# Altium PCB ESP32 USBC V1 1.PcbDoc
Units mil, origin at the board's own origin, x right, y up, seen from the top; angles counter-clockwise.
Board outline 2525 x 1000 mil, 4 copper layers (L1, L2, L3, L4), stack 54.496 mil thick; 67 components, 74 nets, 309 pads, 148 vias.
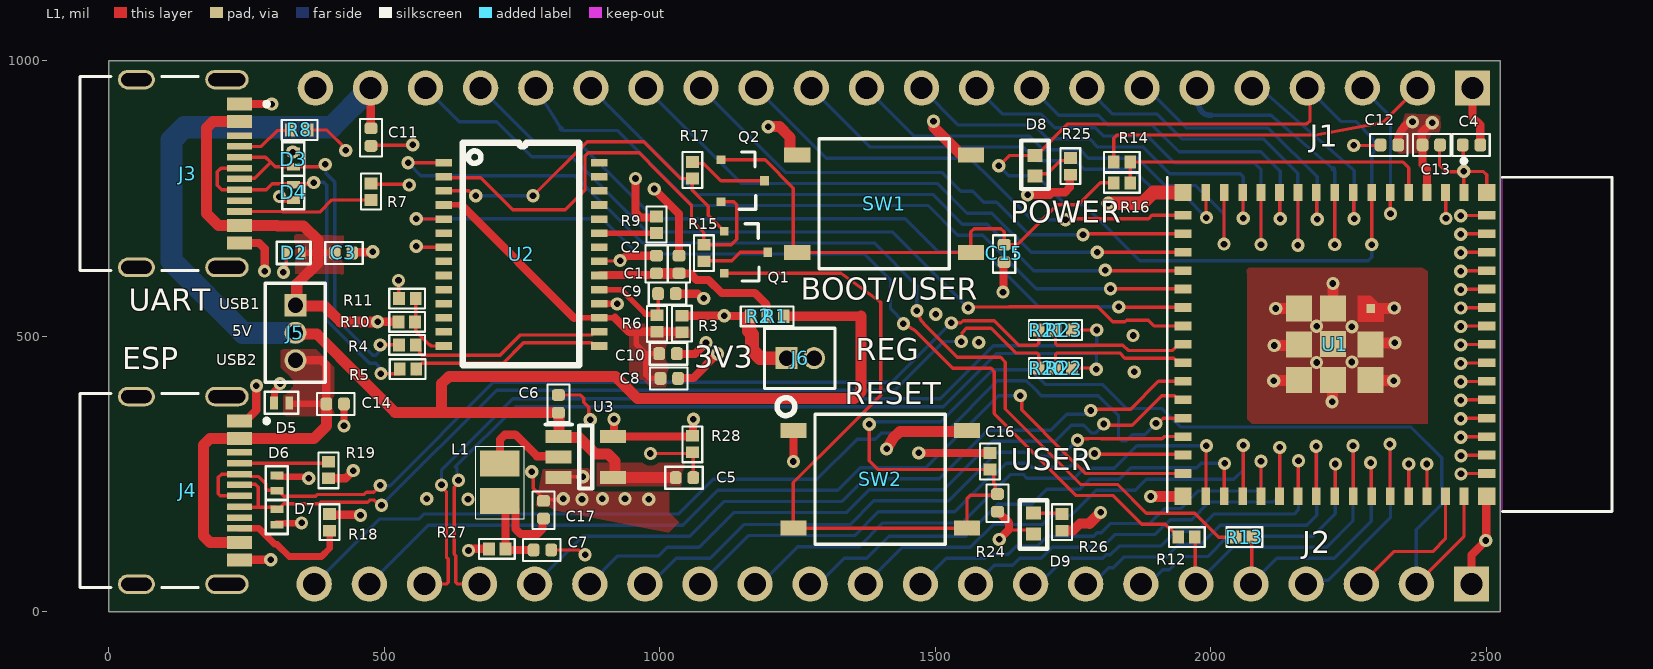
[diagram p0: L1 view]
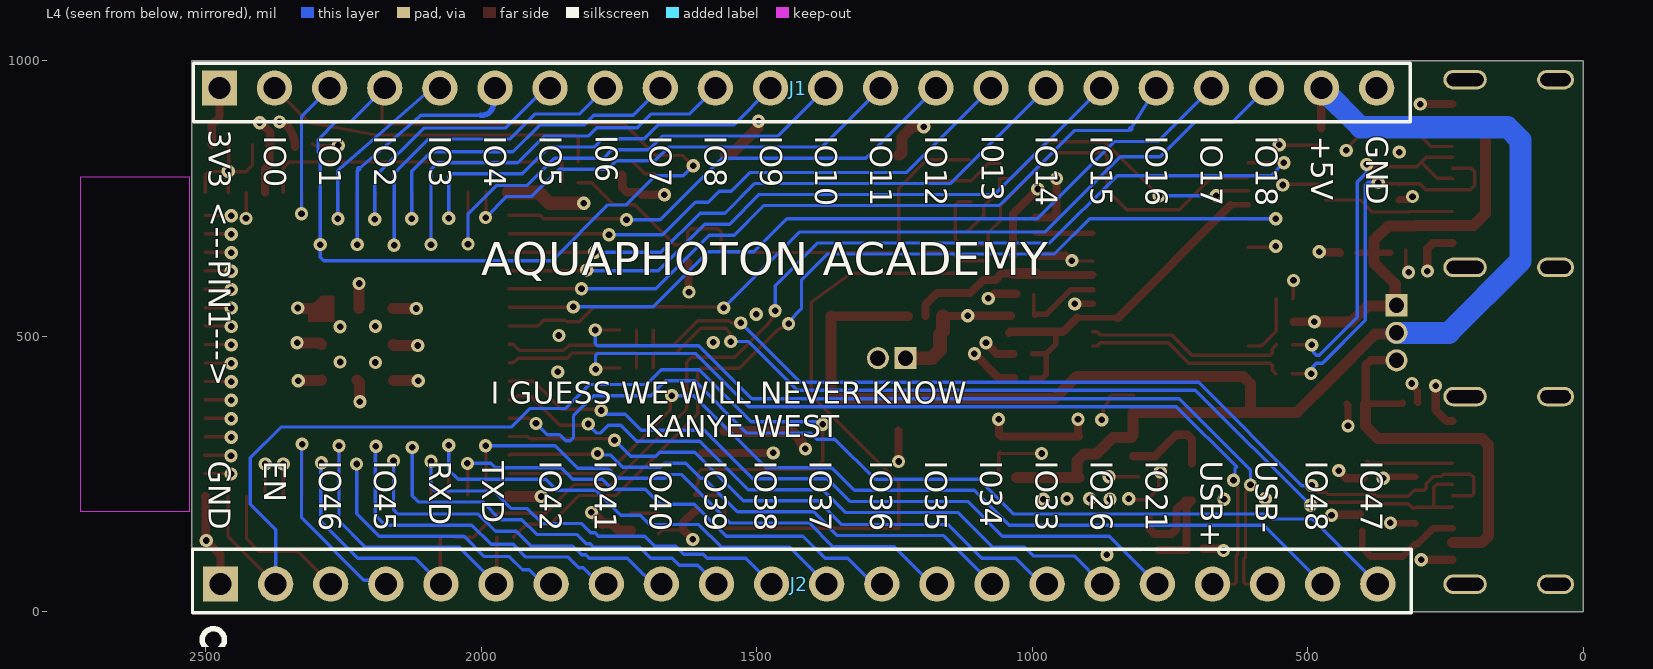
[diagram p1: L4 view, seen from below]
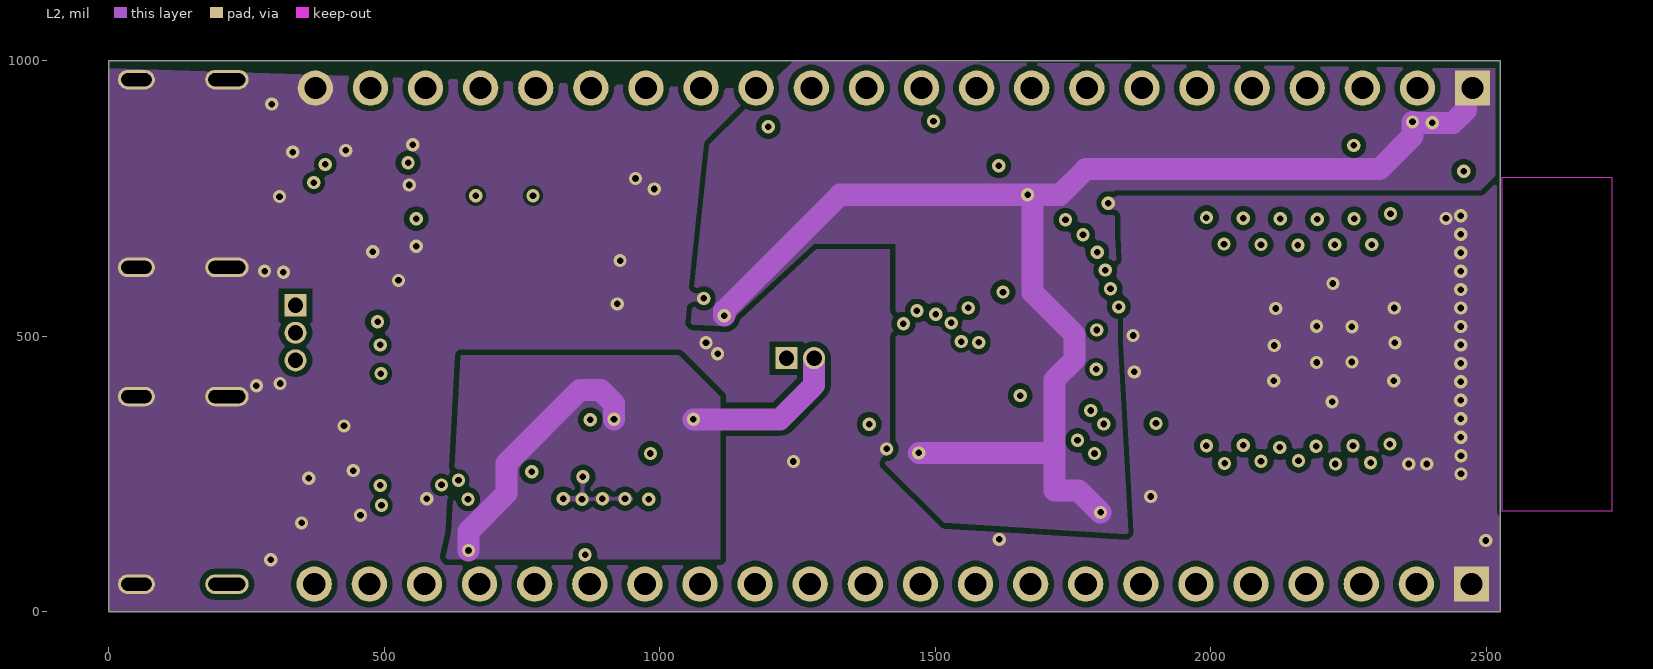
[diagram p2: L2]
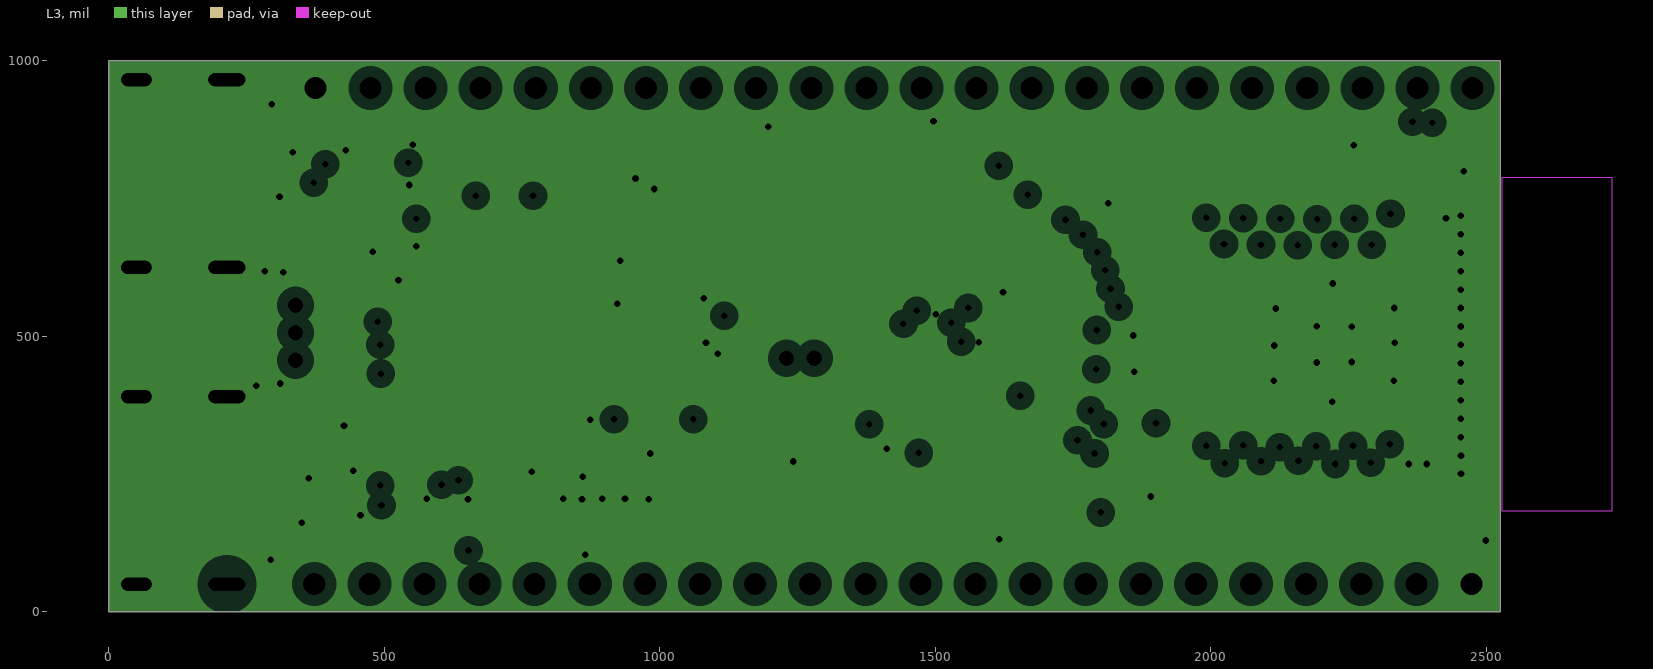
[diagram p3: L3, clearances drawn from the general rule]

## Layer stack, top to bottom
Top Solder: solder mask 0.4, Solder Resist, Dk 3.5
L1: signal copper 1.378
Dielectric 2: prepreg 0.3701, PP-006, Dk 4.1
L2: signal copper 0.5984
Dielectric 1: dielectric 49.8031, FR-4, Dk 4.8
L3: plane copper 1.378, net GND
Dielectric 3: prepreg 0.3701, PP-006, Dk 4.1
L4: signal copper 0.5984
Bottom Solder: solder mask 0.4, Solder Resist, Dk 3.5

## Board outline
0,0 2525,0 2525,1000 0,1000

## Design rules (kind name [scope] priority, off if disabled: settings)
Clearance SMALLER [WithinRoom('FTDI') or WithinRoom('USBC1') or WithinRoom('USBC2')] p1: gap=6 ignorepadtopadclearanceinfootprint=FALSE
Clearance "DIFF90 clearence" [InDifferentialPairClass('DIFF90')] p2: gap=8 ignorepadtopadclearanceinfootprint=FALSE
Clearance [All] p3: gap=10 ignorepadtopadclearanceinfootprint=FALSE except(6: SMDPad-SMDPad)
ComponentClearance R1R2 [InComponent('R1') vs InComponent('R2')] p1: gap=0 collisioncheckmode=3 verticalgap=0 showdistances=FALSE
ComponentClearance R20R22 [InComponent('R20') vs InComponent('R22')] p2: gap=0 collisioncheckmode=3 verticalgap=0 showdistances=FALSE
ComponentClearance R24R26 [InComponent('R21') vs InComponent('R23')] p3: gap=0 collisioncheckmode=3 verticalgap=0 showdistances=FALSE
ComponentClearance [All] p4: gap=10 collisioncheckmode=3 verticalgap=10 showdistances=FALSE
DiffPairsRouting DIFF90 [InDifferentialPairClass('DIFF90')] p1: maxlimit=8.1 minlimit=8 mostfreqgap=8 toplayer_minwidth=6.03 toplayer_maxwidth=6.25 toplayer_prefwidth=6.03 midlayer1_minwidth=5.1 midlayer1_maxwidth=5.2 midlayer1_prefwidth=5.1 bottomlayer_minwidth=6.03 bottomlayer_maxwidth=6.25 bottomlayer_prefwidth=6.03 maxuncoupledlength=500
MinimumSolderMaskSliver [All] p1: minsoldermaskwidth=3.15
PlaneClearance [All] p1: clearance=20
PlaneConnect [All] p1: pad.planeconnectstyle=Relief pad.reliefexpansion=20 pad.reliefentries=4 pad.reliefconductorwidth=20 pad.reliefairgap=10 via.planeconnectstyle=Direct via.reliefexpansion=20 via.reliefentries=4 via.reliefconductorwidth=10 via.reliefairgap=10
PolygonConnect [All] p1: connectstyle=Direct reliefconductorwidth=10 reliefentries=4 polygonreliefangle="90 Angle" airgapwidth=10
RoomDefinition FTDI [False vs False] p1: confinementstyle=ConfineIn formatcopy=TRUE lockcomponents=FALSE outline 573,863 932,863 932,433 573,433
RoomDefinition USBC2 [False vs False] p2: confinementstyle=ConfineIn formatcopy=TRUE lockcomponents=FALSE outline 177,361 312,361 312,72 177,72
RoomDefinition USBC1 [False vs False] p3: confinementstyle=ConfineIn formatcopy=TRUE lockcomponents=FALSE outline 170,942 289,942 289,649 170,649
RoutingVias [All] p1: holewidth=12 width=24 viastyle="Through Hole" minholewidth=12 minwidth=24 maxholewidth=12 maxwidth=24
SilkToSilkClearance [All] p1: silktosilkclearance=6
SilkToSolderMaskClearance [IsPad] p1: minsilkscreentomaskgap=4 clearancetoexposedcopper=TRUE
SolderMaskExpansion [All] p1: expansion=2 istentingtop=FALSE
SupplyNets "Schematic Supply Nets_5" [InNet('+5V')] p1: voltage=0.000
SupplyNets "Schematic Supply Nets_4" [InNet('GND')] p2: voltage=0.000
SupplyNets "Schematic Supply Nets_3" [InNet('+3v3_REG')] p3: voltage=0.000
SupplyNets "Schematic Supply Nets_2" [InNet('+3v3')] p4: voltage=0.000
SupplyNets "Schematic Supply Nets_1" [InNet('+5V_VBUS1')] p5: voltage=0.000
SupplyNets "Schematic Supply Nets" [InNet('+5V_VBUS2')] p6: voltage=0.000
Width [All] p1: maxlimit=100 minlimit=6 preferedwidth=10 minimp=50.000000 maximp=50.000000 favimp=50.000000
23 further rules are at their usual default settings.

## Classes and differential pairs
differential pair class DIFF90: CONC1_USB CONC2_USB CONC_ESP_USB ESP_USB FTDI_USB
differential pair FTDI_USB: +FTDI_USB_P -FTDI_USB_N
differential pair ESP_USB: +ESP_USB_P -ESP_USB_N
differential pair CONC_ESP_USB: +CONC_ESP_USB_P -CONC_ESP_USB_N
differential pair CONC2_USB: +CONC2_USB_P -CONC2_USB_N
differential pair CONC1_USB: +CONC1_USB_P -CONC1_USB_N

## Components (designator, comment, footprint, x,y, rotation, side; value= is the part's Value field where it differs from the comment)
C1 "4.7uf, 16V" CAPACITOR 1035,630 r270 top
C2 "100nf, 50V" CAPACITOR 994,630 r270 top
C3 "1uf ,35V" CAPACITOR 426,651 r180 top
C4 "100nf, 50V" CAPACITOR 2473,847 r0 top
C5 "10uf, 10V" CAPACITOR 1045,243 r0 top
C6 "100nf, 50V" CAPACITOR 816,377 r270 top
C7 "10uf, 10V" CAPACITOR 787,112 r0 top
C8 "100nf, 50V" CAPACITOR 1017.28,423.28 r0 top
C9 "100nf, 50V" CAPACITOR 1013,577 r180 top
C10 "100nf, 50V" CAPACITOR 1015,468 r180 top
C11 "100nf, 50V" CAPACITOR 476,861 r90 top
C12 "10uf, 10V" CAPACITOR 2324,847 r0 top
C13 "100nf, 50V" CAPACITOR 2400,847 r180 top
C14 "1uf ,35V" CAPACITOR 411,377 r180 top
C15 "100nf, 50V" CAPACITOR 1625,650 r90 top
C16 "100nf, 50V" CAPACITOR 1612.9,197.46 r90 top
C17 "10uf, 10V" CAPACITOR 789,185 r90 top
D2 "AQ3045-01ETG" "FUSE_AQ3045-01ETG - DUPLICATE" 336,651 r0 top
D3 "AQ3045-01ETG" "FUSE_AQ3045-01ETG - DUPLICATE" 335,821 r270 top
D4 "AQ3045-01ETG" "FUSE_AQ3045-01ETG - DUPLICATE" 335,761 r90 top
D5 "AQ3045-01ETG" "FUSE_AQ3045-01ETG - DUPLICATE" 314,379 r0 top
D6 "AQ3045-01ETG" "FUSE_AQ3045-01ETG - DUPLICATE" 305,233 r270 top
D7 "AQ3045-01ETG" "FUSE_AQ3045-01ETG - DUPLICATE" 305,172 r90 top
D8 "GREEN" LED_GREEN 1681,809 r270 top
D9 "RED" LED_RED 1680,160 r90 top
J1 "X6511WV-24H-C60D30" "22 PIN HEADERS" 2486,860 r90 bottom
J2 "X6511WV-24H-C60D30" "22 PIN HEADERS" 2484,-40 r90 bottom locked
J3 "HC-TYPE-C-16P-01M" "USB C_HC-TYPE-C-16P-01M" 150,800 r270 top
J4 "HC-TYPE-C-16P-01M" "USB C_HC-TYPE-C-16P-01M" 150,225 r270 top
J5 "1271WV-3P" "3 PIN_HEADERS" 339,556 r0 top
J6 "MTP125-1102S1" 2PIN_HEADERS 1289,445 r90 top
L1 "10uh" INDUCTOR 712,236 r270 top
Q1 "SS8050-G" "BJT TRANSISTOR_SS8050-G(RANGE:120-200)" 1155,655 r180 top
Q2 "SS8050-G" "BJT TRANSISTOR_SS8050-G(RANGE:120-200)" 1149,785 r180 top
R1 "0Ω" RESISTORS 1209,536 r180 top
R2 "0Ω" RESISTORS 1181,536 r0 top
R3 "0Ω" RESISTORS 1040,521 r270 top
R4 "27Ω" RESISTORS 543,484 r0 top
R5 "27Ω" RESISTORS 544,440 r0 top
R6 "0Ω" RESISTORS 995,523.75 r90 top
R7 "5K1" RESISTORS 476,761 r270 top
R8 "5K1" RESISTORS 345,874 r180 top
R9 "10KΩ" RESISTORS 994,701 r270 top
R10 "4K7Ω" RESISTORS 540,526 r180 top
R11 "10KΩ" RESISTORS 543,568 r0 top
R12 "0Ω" RESISTORS 1955,135 r180 top
R13 "0Ω" RESISTORS 2059.25,135 r180 top
R14 "27Ω" RESISTORS 1840,816 r0 top
R15 "10KΩ" RESISTORS 1080,652 r90 top
R16 "27Ω" RESISTORS 1840,778 r0 top
R17 "10KΩ" RESISTORS 1059,800 r270 top
R18 "5K1" RESISTORS 401,161 r270 top
R19 "5K1" RESISTORS 399,258 r90 top
R20 "0Ω" RESISTORS 1704,442 r0 top
R21 "0Ω" RESISTORS 1704,511 r0 top
R22 "0Ω" RESISTORS 1732,442 r180 top
R23 "0Ω" RESISTORS 1732,511 r180 top
R24 "10KΩ" RESISTORS 1599,274 r90 top
R25 "1KΩ" RESISTORS 1745,807 r270 top
R26 "1KΩ" RESISTORS 1730,161 r270 top
R27 "20KΩ" RESISTORS 706,114 r0 top
R28 "61K9" RESISTORS 1059,305 r90 top
SW1 "PTS645SM43JSMTR92 LFS" "TACTICAL SWITCH_PTS645SM43JSMTR92-LFS_C2801847" 1407,750 r0 top
SW2 "PTS645SM43JSMTR92 LFS" "TACTICAL SWITCH_PTS645SM43JSMTR92-LFS_C2801847" 1400,250 r0 top locked
U1 "ESP32-S3-MINI-1U-N8" ESP32 2221.04,487.96 r270 top
U2 "FT232RL-REEL" USB_TO_UART_FT232RL-REEL 625.13,444.72 r0 top locked
U3 "TPS560200DBVT" VOLT_REG_LMR62014XMFXNOPB 859.79,287.6 r0 top

## Footprints (in the part's own frame and the unit in brackets; to place one, negate y for a bottom-side part, rotate by r counter-clockwise, add the part's x,y. Pads: shape width x height; smd on the part's side, far side on the other; paste and mask are expansions set on the pad)
2PIN_HEADERS [mil]
  rect 40x40 hole 28: 1(15,59)
  round 40 hole 28: 2(15,9)
  silkscreen extent -89,-29 69,99, body extent -28,-17 57,83, height 154
"3 PIN_HEADERS" [mil]
  rect 40x40 hole 28: 1(0,0)
  round 40 hole 28: 2(0,-50) 3(0,-100)
  silkscreen extent -55,-140 54,40, body extent -42,-124 43,26, height 154
"22 PIN HEADERS" [mil]
  rect 64x64 hole 40: 1(90,-11)
  round 64 hole 40: 2(90,-111) 3(90,-211) 4(90,-311) 5(90,-411) 6(90,-511) 7(90,-611) 8(90,-711) 9(90,-811) 10(90,-911) 11(90,-1011) 12(90,-1111) 13(90,-1211) 14(90,-1311) 15(90,-1411) 16(90,-1511) 17(90,-1611) 18(90,-1711) 19(90,-1811) 20(90,-1911) 21(90,-2011) 22(90,-2111)
  silkscreen extent 29,-2172 135,36, body extent 41,-2160 141,40, height 365
"BJT TRANSISTOR_SS8050-G(RANGE:120-200)" [mil]
  rect 15.75x17.41 smd: 1(-41,3)
  rect 15.75x15.75 smd: 2(38,-35) 3(38,41)
  silkscreen extent -25,-49 5,55, body extent -48,-54 46,60, height 45
CAPACITOR [mm]
  rrect53% 0.54x0.6 smd: 1(-0.406,0) 2(0.406,0)
  silkscreen extent -0.89,-0.51 0.84,0.51, body extent -0.5,-0.25 0.5,0.25, height 0.55
ESP32 [mm]
  rect 0.8x0.4 smd: 1(-6.924,6.052) 2(-6.924,5.202) 3(-6.924,4.352) 4(-6.924,3.502) 5(-6.924,2.652) 6(-6.924,1.802) 7(-6.924,0.952) 8(-6.924,0.102) 9(-6.924,-0.748) 10(-6.924,-1.598) 11(-6.924,-2.448) 12(-6.924,-3.298) 13(-6.924,-4.148) 14(-6.924,-4.998) 15(-6.924,-5.848) 31(7.076,-5.848) 32(7.076,-4.998) 33(7.076,-4.148) 34(7.076,-3.298) 35(7.076,-2.448) 36(7.076,-1.598) 37(7.076,-0.748) 38(7.076,0.102) 39(7.076,0.952) 40(7.076,1.802) 41(7.076,2.652) 42(7.076,3.502) 43(7.076,4.352) 44(7.076,5.202) 45(7.076,6.052)
  rect 0.4x0.8 smd: 16(-5.874,-6.898) 17(-5.024,-6.898) 18(-4.174,-6.898) 19(-3.324,-6.898) 20(-2.474,-6.898) 21(-1.624,-6.898) 22(-0.774,-6.898) 23(0.076,-6.898) 24(0.926,-6.898) 25(1.776,-6.898) 26(2.626,-6.898) 27(3.476,-6.898) 28(4.326,-6.898) 29(5.176,-6.898) 30(6.026,-6.898) 46(6.026,7.102) 47(5.176,7.102) 48(4.326,7.102) 49(3.476,7.102) 50(2.626,7.102) 51(1.776,7.102) 52(0.926,7.102) 53(0.076,7.102) 54(-0.774,7.102) 55(-1.624,7.102) 56(-2.474,7.102) 57(-3.324,7.102) 58(-4.174,7.102) 59(-5.024,7.102) 60(-5.874,7.102)
  rect 1.2x1.2 smd: 61(-1.575,0.025) 61(-1.574,-1.548) 61(0.051,0.025) 61(0.076,1.752) 61(0.076,-1.548) 61(1.726,1.752) 61(1.726,-1.548) 61(1.727,0.025)
  rect 0.4x0.4 smd paste-1 mask+0: 61(-1.574,1.752)
  rect 0.8x0.8 smd: 62(-6.924,7.102) 63(-6.924,-6.898) 64(7.076,-6.898) 65(7.076,7.102)
  L1 region: -0.974,1.152 -2.174,1.152 -2.174,1.752 -1.574,2.352 -0.974,2.352
  Keep-Out Layer region: 7.776,7.827 -7.624,7.827 -7.624,12.877 7.776,12.877
  Keep-Out Layer region: 7.776,7.827 -7.624,7.827 -7.624,12.877 7.776,12.877
  silkscreen extent -8.47,-7.62 7.78,12.88, body extent -7.62,-7.62 7.78,12.88, height 2.55
"FUSE_AQ3045-01ETG - DUPLICATE" [mm]
  rect 0.35x0.6 smd: 1(-0.356,0) 2(0.356,0)
  silkscreen extent -0.79,-0.51 0.76,0.51, body extent -0.54,-0.34 0.54,0.34, height 0.42
INDUCTOR [mm]
  rect 1.2x1.82 smd: 1(-0.835,-0.051) 2(0.885,-0.051)
  silkscreen extent -1.63,-1.17 1.7,1.07, body extent -1,-0.85 1,0.75, height 1.2
LED_GREEN [mm]
  rect 0.6x0.7 smd: 1(-0.475,0) 2(0.475,0)
  silkscreen extent -1.17,-0.64 1.07,0.64, body extent -0.5,-0.3 0.5,0.3, height 0.2
LED_RED [mm]
  rect 0.6x0.7 smd: 1(-0.475,0.051) 2(0.475,0.051)
  silkscreen extent -1.17,-0.58 1.07,0.69, body extent -0.53,-0.25 0.47,0.35, height 0.2
RESISTORS [mm]
  rect 0.54x0.6 smd: 1(-0.406,0) 2(0.356,0)
  silkscreen extent -0.86,-0.46 0.79,0.46, body extent -0.57,-0.28 0.47,0.28, height 0.38
"TACTICAL SWITCH_PTS645SM43JSMTR92-LFS_C2801847" [mm]
  rect 1.2x0.7 smd: 1(-4,2) 2(4,2) 3(-4,-2.5) 4(4,-2.5)
  silkscreen extent -3,-3.25 3,2.75, body extent -4.5,-3.25 4.5,2.75, height 4.3
"USB C_HC-TYPE-C-16P-01M" [mm]
  rect 0.6x1.14 smd mask+0.05: A1B12(-3.073,2.218) A4B9(-2.273,2.218) B1A12(3.327,2.218) B4A9(2.527,2.218)
  rect 0.3x1.14 smd mask+0.05: A5(-1.123,2.218) A6(-0.123,2.218) A7(0.377,2.218) A8(1.377,2.218) B5(1.877,2.218) B6(0.877,2.218) B7(-0.623,2.218) B8(-1.623,2.218)
  oval 0.9x2 hole 0.6 slot 1.7 at 90 deg: S1(-4.198,1.638) S2(4.452,1.638)
  oval 0.9x1.7 hole 0.6 slot 1.4 at 90 deg: S3(-4.198,-2.532) S4(4.452,-2.532)
  silkscreen extent -4.34,-5.13 4.6,3.57, body extent -4.32,-5.06 4.62,2.84, height 3.31
USB_TO_UART_FT232RL-REEL [mm]
  rect 0.75x0.35 smd: 1(-0.432,9.398) 2(-0.432,8.748) 3(-0.432,8.098) 4(-0.432,7.448) 5(-0.432,6.798) 6(-0.432,6.148) 7(-0.432,5.498) 8(-0.432,4.848) 9(-0.432,4.198) 10(-0.432,3.548) 11(-0.432,2.898) 12(-0.432,2.248) 13(-0.432,1.598) 14(-0.432,0.948) 15(6.728,0.948) 16(6.728,1.598) 17(6.728,2.248) 18(6.728,2.898) 19(6.728,3.548) 20(6.728,4.198) 21(6.728,4.848) 22(6.728,5.498) 23(6.728,6.148) 24(6.728,6.798) 25(6.728,7.448) 26(6.728,8.098) 27(6.728,8.748) 28(6.728,9.398)
  silkscreen extent 0.43,0.05 5.82,10.31, body extent -0.8,-0.09 7.1,10.4, height 2.01
VOLT_REG_LMR62014XMFXNOPB [mm]
  rect 1.2x0.6 smd: 1(-1.098,0.772) 2(-1.098,-0.178) 3(-1.098,-1.128) 4(1.402,-1.128) 5(1.402,0.772)
  silkscreen extent -1.7,-1.63 0.45,1.32, body extent -1.12,-1.57 1.68,1.33, height 1.45

## Part data
C1: library part "Cap 4.7uf", "16V 4.7uF X5R ±20% 0402 Multilayer Ceramic Capacitors MLCC - SMD/SMT ROHS", LCSC Part number=C318563, Manufacturer="Samsung Electro-Mechanics", Manufacturer part number=CL05A475MO5NUNC
C2 C4 C8 C9 C10 C11 C13 C15 C16: library part "Cap 0.1uf", "Ceramic Capacitor, 50V, 0.1uF, Surface Mount", LCSC Part number=C307331, Manufacturer=Samsung, Manufacturer part number=CL05B104KB54PNC
C3 C14: library part "Cap 1uf", "Ceramic Capacitor, 35V, 1uF, Surface Mount", LCSC Part number=C307413, Manufacturer="Samsug Electro-Mechanics", Manufacturer part number=CL05A105KL5NRNC
C5 C7 C17: library part "cap 10uf", "Ceramic Capacitor, 10V, 10uF, Surface Mount", Manufacturer="Samsug Electro-Mechanics", Manufacturer part number=CL05A106MP8NUB8, Supplier Part Number=C307415, Supplier=LCSC
C6: library part "Cap 0.1uf", "Ceramic Capacitor, 50V, 0.1uF, Surface Mount", Manufacturer=Samsung, Manufacturer part number=CL05B104KB54PNC, Supplier Part Number=C307331, Supplier=LCSC
C12: library part "cap 10uf", "Ceramic Capacitor, 10V, 10uF, Surface Mount", LCSC Part number=C307415, Manufacturer="Samsug Electro-Mechanics", Manufacturer part number=CL05A106MP8NUB8
D2 D3 D4 D5 D6 D7: library part "Fuse AQ3045-01ETG", "3A@8/20us 12V 40W 6.8V 5.3V SOD-882 ESD and Surge Protection (TVS/ESD) ROHS", LCSC Part number=C3710326, Manufacturer=Littelfuse, Manufacturer part number=AQ3045-01ETG
D8: library part LED_GREEN_XL-1608SURC-06, "20mA 1000mcd Green Lens -20℃~+85℃ Positive Stick Blue 120° 70mW 3.3V 0402 LED Indication - Discrete ROHS", LCSC Part number=C965797, Manufacturer=XINGLIGHT, Manufacturer part number=XL-1608SURC-06
D9: library part LED_RED_XL-1608SURC-06, "20mA 330mcd Colorless transparent lens -20℃~+85℃ Positive Stick 620nm~630nm Red 120° 50mW 2.3V 0603 LED Indication - Discrete ROHS", LCSC Part number=C965799, Manufacturer=XINGLIGHT, Manufacturer part number=XL-1608SURC-06
J1 J2: library part "24 Pin Headers", "Gold 250V 3A Policy 2.5mm 24P 260℃ -40℃~+105℃ 2.54mm Single Row Black Brass 2.54mm 1x24P Plugin,P=2.54mm Pin Headers ROHS", LCSC Part number=C725956, Manufacturer="XKB Connection", Manufacturer part number=X6511WV-24H-C60D30
J3 J4: library part "USB-C HCTL HC-TYPE-C-16P-01M", "5A 1 260℃ Horizontal attachment 16P Female -30℃~+85℃ Gold Copper Type-C SMD USB Connectors ROHS", Manufacturer=HCTL, Supplier Part Number=C2894899, Manufacturer part number=HC-TYPE-C-16P-01M, Supplier=LCSC
J5: library part "3 Pin headers _1271WV-3P", "Gold Direct Insert Policy 1mm 3P 4mm -40℃~+105℃ 2.2mm 1.27mm Single Row 1x3P Plugin,P=1.27mm Pin Headers ROHS", LCSC Part number=C7470079, Manufacturer=HanElectricity, Manufacturer part number=1271WV-3P
J6: library part "2 Pin headers_MTP125-1102S1", "Direct Insert Policy 2.5mm 2P 6mm -40℃~+105℃ 3mm 2.54mm Single Row Black Brass 1x2P Plugin,P=2.54mm Pin Headers ROHS", LCSC Part number=C358684, Manufacturer=MINTRON, Manufacturer part number=MTP125-1102S1
L1: library part inductor_SL0650-220M, "3A 22uH ±20% 5A SMD,7.1x6.6mm Inductors (SMD) ROHS", Manufacturer=TECHFUSE, Manufacturer part number=SL0650-220M, Supplier Part Number=C22463831, Supplier=LCSC
Q1 Q2: library part "BJT tTansistor", "25V 300mW 120@100mA,1V 1.5A NPN SOT-23 Bipolar (BJT) ROHS", LCSC Part number=C164886, Manufacturer="Jiangsu Changjing Electronics Technology Co., Ltd.", Manufacturer part number=SS8050-G(RANGE:120-200)
R1 R2 R3 R6 R12 R13 R20 R21 R22 R23: library part "Resistor 0Ω", "62.5mW Thick Film Resistors 50V ±5% 0Ω 0402 Chip Resistor - Surface Mount ROHS", Manufacturer=YAGEO, Manufacturer part number=AC0402JR-070RL, Supplier Part Number=C138289, Supplier=LCSC
R4 R5 R14 R16: library part "Resistor 27Ω", "125mW Thin Film Resistor ±25ppm/℃ ±1% 27Ω 0805 Chip Resistor - Surface Mount ROHS", Manufacturer=YAGEO, Manufacturer part number=RT0805FRD0727RL, Supplier Part Number=C869052, Supplier=LCSC
R7 R8 R18 R19: library part "Resistor 5.1KΩ", "125mW Thin Film Resistor ±50ppm/℃ ±1% 5.1kΩ 0805 Chip Resistor - Surface Mount ROH", Manufacturer=YAGEO, Manufacturer part number=RT0805FRE075K1L, Supplier Part Number=C869519, Supplier=LCSC
R9 R11: library part "Resistor 10KΩ", "250mW Thin Film Resistor ±50ppm/℃ ±1% 10kΩ 1206 Chip Resistor - Surface Mount ROHS", Manufacturer=YAGEO, Manufacturer part number=RT1206FRE0710KL, Supplier Part Number=C862226, Supplier=LCSC
R10: library part "Resistor 4k7Ω", "62.5mW Thick Film Resistors 50V ±100ppm/℃ ±1% 4.7kΩ 0402 Chip Resistor - Surface Mount ROHS", Manufacturer=YAGEO, Manufacturer part number=RC0402FR-074K7L, Supplier Part Number=C105871, Supplier=LCSC
R15 R17 R24: library part "Resistor 10KΩ_AC0402FR-0710KL", "250mW Thin Film Resistor ±50ppm/℃ ±1% 10kΩ 1206 Chip Resistor - Surface Mount ROHS", LCSC Part number=C862226, Manufacturer=YAGEO, Manufacturer part number=RT1206FRE0710KL
R25 R26: library part "Resistor 1kΩ", "62.5mW Thin Film Resistor 50V ±50ppm/℃ ±1% 1kΩ 0402 Chip Resistor - Surface Mount ROHS", Manufacturer=YAGEO, Manufacturer part number=RT0402FRE071KL, Supplier Part Number=C136974, Supplier=LCSC
R27: library part "Resistor 20K", "62.5mW Thick Film Resistors 50V ±100ppm/℃ ±1% 20kΩ 0402 Chip Resistor - Surface Mount ROHS", Manufacturer=YAGEO, Manufacturer part number=RC0402FR-0720KL, Supplier Part Number=C93942, Supplier=LCSC
R28: library part "Resistor 61.9KΩ", "62.5mW Thick Film Resistors 50V ±100ppm/℃ ±1% 61.9kΩ 0402 Chip Resistor - Surface Mount ROHS", Manufacturer=YAGEO, Manufacturer part number=RC0402FR-0761K9L, Supplier Part Number=C327331, Supplier=LCSC
SW1 SW2: library part "Tactile Switch", "Round Button 50mA Standing paste SPST - normally open 160gf 12V SMD,6x6mm Tactile Switches ROHS", LCSC Part number=C2801847, Manufacturer=C&K, Manufacturer part number="PTS645SM43JSMTR92 LFS"
U1: "Esp32-S3-mini-1 board", Manufacturer="Espressif Systems", Supplier Part Number=C2980299, Manufacturer part number=ESP32-S3-MINI-1U-N8, Supplier=LCSC
U2: library part USB_To_UART_FT232RL-REEL, "USB to UART UART SSOP-28-208mil USB Converters ROHS", Manufacturer=LTDI, Supplier Part Number=C8690, Manufacturer part number=FT232RL-REEL, Supplier=LCSC
U3: library part Vol_REG_TPS560200DBVT, "Boost type Adjustable 2A 3V~20V 2.7V~14V SOT-23-5 DC-DC Converters ROHS", Manufacturer="Texas Instruments", Supplier Part Number=C2070785, Manufacturer part number=TPS560200DBVT, Supplier=LCSC

## Via types
v1: diameter 24, hole 12, L1 to L4, tented both sides, 148 vias

## Nets (pads, with @x,y where several pads share a name; then routed paths per layer and width w, separated by ;. In a path a pad name is that pad's centre, name@x,y a point inside that pad or via, vN(x,y) a via of type N, cw(c..) or ccw(c..) an arc to the next point about the centre after c; other vN are vias at no path point)
+3v3: C4.2 C12.2 C13.2 J1.1 J6.1 R2.1 R3.1 R24.2 R25.2 R26.2 U1.3 | length 3387.3
  L1 w15: R3.1@1038.5,536.5 1039,537 v1(1117,537) 1117.5,536.5 1164.5,536.5 R2.1 ; v1@1468,290 v1(1470,288) R24.2 ; v1(1667.51,756.49) 1707.67,756.49 1712.17,760.99 1735.18,760.99 1743.96,769.77 1743.96,791.96 R25.2 ; C12.2@2337.75,843.77 2338.26,851.31 cw(c2394.52,843.71) 2352.16,881.5 2352.48,881.83 2354.6,883.94 v1(2366,888.66) ; U1.3 2392.36,803.13 2384,811.49 C13.2 2382.69,848.31 2382.69,869.27 2400.42,887 v1(2402,887) ; J1.1 2475,897 2489,883 C4.2
  L1 w18: R26.2@1728.13,147.37 1749.68,147.37 1762.31,160 1780,160
  L1 w20: 1780,160 v1(1800,180)
  L1 w25: R2.1@1161.87,536 1161.87,509.03 1167.36,503.54 1167.36,474.64 1182,460 J6.1
  L2 w40: v1(1117,537) 1117,546 1327.49,756.49 v1(1667.51,756.49) ; v1@1470.22,288.22 1716,288.22 ; v1(1800,180) 1760,220 1716,220 1716,288.22 ; v1(2366,888.66) v1@2366,887 ; J1.1 2463,938 2463,910.43 2439.57,887 v1(2402,887) v1@2366,887 ; v1(1667.51,756.49) 1676.49,747.51 1676.49,579.37 1753,502.86 1753,457.57 1716,420.57 1716,288.22 ; v1(1667.51,756.49) 1726.49,756.49 1773,803 2306,803 2366,863 v1@2366,887
+3V3_FTDI: C8.1 C10.2 R3.2 R6.1 U2.4 U2.17 | length 668.6
  L1 w10.01: U2.4 640.05,737.95 ; 844.77,533.23 U2.17 919,533.23 ; 957,507.75 957,485.45 974.72,467.72 ; C10.2 975,468 974.72,467.72 ; C8.1 1001.05,423.5 981.5,423.5 974.72,430.28 974.72,467.72
  L1 w15: 640.05,737.95 844.77,533.23 ; 919,533.23 944.48,507.75 957,507.75 R6.1 1040.25,507.75 R3.2@1042,506
+3v3_REG: J6.2 R27.1 R28.2 U3.5 | length 1013.8
  L1 w15: v1(653,111) 655.44,111 658.44,114 R27.1 ; v1(917,349) 917,320 U3.5 1055.56,318 1059.06,321.5 1060.5,321.5 1060.5,348.5 v1(1061,349)
  L2 w40: v1(653,111) 653,145.6 722,214.6 722,269 855,402 892.57,402 917,377.57 v1(917,349) ; v1(1061,349) 1218,349 1280,411 J6.2
+5V: C5.1 C6.2 C11.2 J1.21 J5.2 R1.1 U3.1 U3.4 | length 2934.8
  L1 w15: J1.21 475.5,949.5 475.5,877.5 C11.2
  L1 w18: R1.1 1365,536
  L1 w20: J5.2 341.36,503.64 377.61,503.64 459,422.25 459,422 520,361 604,361 ; U3.4@915.2,243 C5.1 ; U3.4@916.9,243.2 918.71,245.01 918.71,273.29 905.81,286.19 883.09,286.19 853.09,316.19 820,316.19 816.79,319.4 816.79,360.21 C6.2 604,361 ; 1365,536 1365,398.72 1353.28,387 960,387 920,427 617.48,427 604,413.52 604,361
  L4 w40: J5.2 244.08,506 113.78,636.3 113.78,855.57 137.21,879 170,879 404,879 J1.21
+5V_VBUS1: C3.2 D2.2 J3.A4B9 J3.B4A9 J5.1 R10.2 | length 838.3
  L1 w12: D2.2 379.5,651 ; 380.88,651.14 C3.2@410.38,651.14
  L1 w15: v1(488,526) R10.2
  L1 w20: J3.A4B9@237.22,889.39 189.59,889.39 177.88,877.67 177.88,722.12 199.49,700.51 J3.B4A9 ; J3.B4A9@237.91,701.1 289,701.1 305.63,701.1 306.62,700.11 353.89,700.11 379.5,674.5 379.5,651 379.5,632.5 341.28,594.28 341.28,558.28 J5.1 ; J5.1@334.71,555 391.46,555 420.46,526 v1(488,526)
+5V_VBUS2: C14.2 D5.2 J4.A4B9 J4.B4A9 J5.3 | length 712
  L1 w12: D5.2 328,377.89 328.89,377 389,377 C14.2@397,377
  L1 w15: J5.3 386.21,456 395,447.21 C14.2@395,378.18
  L1 w20: J4.B4A9 200,125.51 183.72,125.51 172,137.23 172,302.77 183.72,314.49 200,314.49 271,314.49 372.49,314.49 395,337 C14.2
+VCC_FTDI: C1.2 C2.2 R1.2 R2.2 U2.20 | length 350.3
  L1 w10.01: U2.20 U2.20@891.03,611.03 ; C2.2@991.03,611.03 C2.2 ; R1.2@1193.59,537.08 R1.2@1194.67,536
  L1 w15: C1.2 1035.58,613.42 1055.39,613.42 1066.81,602 1088.5,602 1112.5,578 1172.55,578 1193.59,556.96 R1.2@1193.59,537.08
  L1 w15.01: U2.20@891.03,611.03 932,611.03 C2.2@991.03,611.03
  L1 w20: C2.2 C1.2
BTN_GPIO0: C15.2 Q2.2 R16.1 SW1.3 SW1.4 | length 952.9
  L1 w6: Q2.2@1114,820 1191,820 1242.52,768.48 SW1.3@1242.52,651.57 ; SW1.3 SW1.4 1564.48,688.98 1570.34,694.84 1619.14,694.84 1625,688.98 C15.2 1649,666 1721.49,738.49 1759.49,738.49 1799,778 R16.1
CHIP_PU: C16.2 J2.2 Q1.3 R24.1 SW2.3 SW2.4 U1.45 | length 3134.8
  L1 w6: Q1.3 1329.06,614 1400.98,561.36 1400.98,392.79 1331.96,323.78 1242.52,234.34 SW2.3 SW2.4 1557.48,205.14 1563.34,211 C16.2@1612.48,211 ; v1(1380,340) 1380,273.86 1395.86,258 1600.18,258 1605.81,252.37 1605.81,233.19 1609.04,229.96 1609.04,217.32 C16.2 ; J2.2 2459.29,136.29 U1.45
  L4 w6: v1(1380,340) 1382.68,342.68 1389.35,342.68 1391.41,344.74 1510.17,344.74 1604.43,439 1673.47,439 1700.47,412 1803.8,412 1847.25,368.55 1911.73,368.55 1945.36,334.92 2363.26,334.92 2419,279.18 2419,194.9 2373,148.9 J2.2
CON_GPIO0: J1.2 R14.1 | length 624.5
  L1 w6: R14.1 1824,859.14 1829.86,865 2191.17,865 2309.65,887.13 2312.7,887.7 2314.89,889.89 J1.2
CONC1_USB_N: D3.2 J3.A7 J3.B7 R4.1 | length 677.8
  L1 w6.25: J3.A7 238.5,786.33 265.25,786.33 294.02,815.1 ; J3.B7 284.6,824.53 294.02,815.1 ; v1(393.04,811.63) 388.24,811.63 383.61,807 D3.2 302.12,807 294.02,815.1 ; v1(493,484) R4.1
  L4 w6.25: v1(393.04,811.63) 394.34,810.33 394.34,795.2 409.88,779.67 409.88,534.42 479.17,465.12 484.35,465.12 489.6,470.38 489.6,480.6 v1(493,484)
CONC1_USB_P: D4.2 J3.A6 J3.B6 R5.1 | length 701.6
  L1 w6.25: J3.A6 203.84,804.84 197,798 197,773.71 205.24,765.47 J3.B6 286.1,765.47 289,768.37 296.85,776.23 333.77,776.23 D4.2 336.78,776.78 370.48,776.78 v1(372.26,778.56) ; v1(494,432) R5.1@528,432
  L4 w6.25: v1(372.26,778.56) 373.12,779.42 389.97,779.42 395.62,773.77 395.62,528.52 473.27,450.88 484.35,450.88 490.6,444.62 490.6,435.4 v1(494,432)
CONC2_USB_N: D6.2 J4.A7 J4.B7 R21.1 | length 1758.9
  L1 w6.03: J4.A7 202.6,210.16 199.07,213.69 199.07,243.63 204.97,249.53 J4.B7 253.86,249.53 258.33,245.06 271.94,245.06 285.19,231.81 285.19,223.69 288.72,220.16 306.77,220.16 313.8,213.13 313.8,213.05 317.33,209.52 375.66,209.52 378.82,212.67 463.97,212.67 467.82,216.53 480.71,216.53 493,228.82 v1(493,229) ; v1(1529,524) v1(1529,524) 1546.51,523.96 1550.62,528.07 1606.93,528.07 1651.49,483.52 1684.47,483.52 1688,487.05 R21.1
  L4 w6.03: v1(493,229) 493.65,228.35 510.51,228.35 698.16,416 1421,416 v1(1529,524)
CONC2_USB_P: D7.2 J4.A6 J4.B6 R20.1 | length 1720.3
  L1 w6.03: J4.B6 238.56,189.24 271.16,189.24 ; J4.A6 238.51,231.03 266.13,231.03 271.16,226 271.16,189.24 ; v1(495,193) 491.55,193 482.05,202.5 473.63,202.5 469.78,198.64 384.63,198.64 381.47,195.48 317.33,195.48 313.8,191.95 313.8,191.87 309.92,188 305,188 303.76,189.24 271.16,189.24 ; v1(1547,490) 1548.55,491.55 1548.55,506.16 1556.44,514.05 1601.11,514.05 1645.67,469.48 1684.47,469.48 1688,465.95 R20.1
  L4 w6.03: v1(495,193) 703.97,401.97 1426.81,401.97 1514.88,490.04 v1(1547,490) v1(1547,490)
CONC_ESP_USB_N: J2.20 R23.1 | length 1607.9
  L1 w6.03: J2.20 612.45,50 615.99,53.53 615.99,95.63 612.99,98.63 612.99,217.48 604,226.47 v1(604,230) ; R23.1 v1(1793,511) v1@1794,512
  L4 w6.03: v1(604,230) 604,257.17 732.87,386.05 1508.99,386.05 1605.46,482.52 1788.97,482.52 1793,486.55 v1(1793,511)
CONC_ESP_USB_P: J2.19 R22.1 | length 1580.4
  L1 w6.03: v1(634.87,238.44) 634.87,233.77 627.01,225.92 627.01,104.44 630.01,101.44 630.01,53.53 633.55,50 J2.19 ; R22.1 1790,442 v1(1792,440)
  L4 w6.03: v1(634.87,238.44) 634.87,241.97 632.18,244.65 632.18,259.48 629.17,262.5 738.68,372.02 1514.8,372.02 1611.27,468.48 1788.97,468.48 1792.5,464.95 1792.5,440.5 v1(1792,440)
DTR_FTDI: Q2.3 R15.2 U2.2 | length 830.9
  L1 w6: U2.2 610.02,787.24 674.76,787.24 733,729 828.39,729 864.24,764.85 864.24,826.17 870.68,832.61 932,832.61 962.57,832.61 998.53,796.65 1057.5,737.68 1057.5,710.5 1080,688 R15.2 1129.96,666 1139.87,675.91 1139.87,738.04 1134.02,743.9 1111.1,743.9 Q2.3
ESP_USB_N: R21.2 R23.2 U1.23 | length 265.3
  L1 w6.03: R23.2 1718,487.05 1721.53,483.52 1840.41,483.52 1849.93,474 1930.61,474 1941.57,484.96 U1.23
ESP_USB_P: R20.2 R22.2 U1.24 | length 264.3
  L1 w6.03: R22.2 1718,465.95 1721.53,469.48 1834.6,469.48 1844.11,459.97 1933.1,459.97 1941.57,451.5 U1.24
FTDI_RESET: C9.2 R6.2 U2.19 | length 162.4
  L1 w6: R6.2 997,539.75 C9.2@997,575
  L1 w10.01: U2.19 929.59,584.41 932,582 974.04,539.96 992.79,539.96 R6.2
FTDI_USB_N: R4.2 R10.1 R11.2 U2.14 U2.16 | length 484.8
  L1 w6.25: R4.2 564.5,476.5 564.5,468.99 568.17,465.33 710.16,465.33 746.79,501.97 876.46,501.97 882.13,507.64 U2.16 ; R11.2 557,527 R10.1 557.52,524.48 557.52,508.48 573,493 582,484 583.09,484 585.05,482.05 U2.14
FTDI_USB_P: R5.2 U2.15 | length 362.7
  L1 w6.25: R5.2@558,432 564.5,438.5 564.5,447.42 568.17,451.08 716.06,451.08 752.69,487.72 876.46,487.72 882.13,482.05 U2.15
GND: C1.1 C2.1 C3.1 C4.1 C5.2 C6.1 C7.2 C8.2 C9.1 C10.1 C11.1 C12.1 C13.1 C14.1 C15.1 C16.1 C17.2 D2.1 D3.1 D4.1 D5.1 D6.1 D7.1 D9.1 J1.22 J2.1 J3.A1B12 J3.B1A12 J3.S1 J3.S2 J3.S3 J3.S4 J4.A1B12 J4.B1A12 J4.S1 J4.S3 J4.S4 R7.1 R8.1 R9.1 R11.1 R18.1 R19.1 R28.1 SW1.1 SW1.2 SW2.1 SW2.2 U1.1 U1.2 U1.42 U1.43 U1.46 U1.47 U1.48 U1.49 U1.50 U1.51 U1.52 U1.53 U1.54 U1.55 U1.56 U1.57 U1.58 U1.59 U1.60 U1.61 U1.62 U1.63 U1.64 U1.65 U2.7 U2.18 U2.21 U3.3 | length 4480.6
  L1 w6: v1(317,616) 317,619.79 322,624.79 D2.1 D2.1@322,656 ; R8.1 396,874 430,840 v1(430,837) ; R7.1@473,776 473.36,775.64 543.91,775.64 v1(545.27,774.27) ; C11.1 477.18,846.18 550.41,846.18 v1(551.59,847.35) ; v1(526,601) 526.5,600.5 526.5,568.5 R11.1 ; v1(558,663) 559.82,661.18 U2.7 ; v1(767.83,253.96) 770.51,251.28 770.51,223.73 786.58,207.66 786.58,206.58 791.92,201.24 C17.2@793,201.24 ; C17.2@793,201 795,203 823,203 v1(825,205) ; C7.2 852.05,112 860.72,103.33 v1(864.51,103.33) ; U3.3@806.95,244.6 v1(860.6,244.6) ; C6.1 856.31,393 862.16,387.14 862.16,380 871.32,370.84 871.32,350.68 v1(874,348) ; U2.21 890.71,636.3 927.29,636.3 v1(928,637.01) ; v1(983,287) 1057,287 R28.1 1061,287 C5.2 ; 1633.11,148.11 1671.19,148.11 D9.1 ; v1@1861,432.5 v1(1861,435) ; v1(2259.37,846.03) 2303,846.03 C12.1@2305.54,849.12 ; U1.42@2359,209.88 2358.95,209.93 2358.95,267.95 v1(2359,268) ; v1(2392,268) 2392.18,267.82 2392.18,211.2 U1.43@2392.75,210.63 ; C13.1@2415,847 2415,810 2427,798 2458,798 v1(2459,799) ; v1@2426.08,714.3 U1.2@2426.08,760.55 ; v1@2454.38,317.39 U1.48@2501,317.39 ; v1@2454.38,350.85 U1.49@2501,350.85 ; v1@2454.38,384.31 U1.50@2501,384.31 ; v1@2454.38,417.78 U1.51@2501,417.78 ; v1@2454.38,451.24 U1.52@2501,451.24 ; v1@2454.38,484.71 U1.53@2501,484.71 ; v1@2454.38,518.17 U1.54@2501,518.17 ; v1@2454.38,551.64 U1.55@2501,551.64 ; v1@2454.38,585.1 U1.56@2501,585.1 ; v1@2454.38,618.57 U1.57@2501,618.57 ; v1@2454.38,652.03 U1.58@2501,652.03 ; v1@2454.38,685.5 U1.59@2501,685.5 ; v1@2454.38,718.96 U1.60@2501,718.96 ; v1@2454.75,250.75 U1.46@2501.37,250.75 ; v1@2454.75,283.75 U1.47@2501.37,283.75 ; C4.1@2458.08,847 2458.08,799.92 v1(2459,799) ; U1.1 2459.15,760.7 v1@2459.15,798.85 ; U1.62 2500.63,792.82 2494.77,798.68 2459.32,798.68 v1@2459.15,798.85 ; v1(2459,799) v1@2459.15,798.85
  L1 w12: D5.1 300.89,379.89 300.89,400.64 311,410.75 v1(311,414) ; D7.1@305,160 305.5,160.5 349.5,160.5 v1(350,161) ; D6.1@305,245 356.97,245 359.75,242.21 v1(363,242.21) ; v1(309.97,753.1) 313.22,753.1 318.43,747.89 334.11,747.89 D4.1 ; v1(333.89,833.89) D3.1 ; v1(427,337) 427,375 C14.1@429,377 ; U2.18 890.21,558.61 922.86,558.61 v1(923.06,558.4)
  L1 w15: J4.B1A12 v1(293.98,94.02) ; J4.A1B12 247.95,345.98 268,366.03 v1(268,410) ; J3.B1A12 237.53,668.81 273.19,668.81 283,659 v1(283,618) ; J3.A1B12 289,920.99 v1(296,921) ; R19.1 430,242 v1(444,256) ; R18.1@405.19,177.01 405.19,176.12 405.31,176 456,176 v1(457,175) ; C3.1 443,652 478,652 v1(479,653) ; v1(928,637.01) 930.44,637.01 932,638.57 939.43,646 C2.1 ; v1(956,786) 956,723.92 962.81,717.11 ccw(c994,760.87) 965.79,715.13 R9.1@994,715.13 ; v1(990,767) 1035,722 C1.1 ; C9.1 1068.85,577 1077.51,568.34 v1(1079.94,568.34) ; C8.2@1033.28,424 1061,424 v1(1105,468) ; C10.1@1034.13,467.72 1064.13,467.72 1084,487.59 v1(1084,488) ; v1@1241,271 v1(1242.52,272.52) SW2.1 ; C16.1@1608.59,184.59 1611.72,181.46 C16.1 1623.51,170.85 1624.38,170.85 1633.9,161.33 1633.9,148.9 v1(1616,131) ; v1(1622.91,579.91) 1623.95,580.95 1623.95,632.95 C15.1 ; J2.1 2473,103 v1(2499,129) 2499.82,129.81 2499.82,208.56 U1.65
  L1 w20: v1(1197,880) 1217,880 1236.2,860.8 1236.2,832.52 1239.98,828.74 SW1.1@1242.52,828.74 ; v1(1411.68,295.32) 1423.65,314.86 1435,326.21 1435.61,326.58 1543.86,326.58 SW2.2 ; v1(1496.82,890) 1497.58,889.23 1497.58,878.8 1547.64,828.74 SW1.2@1557.48,828.74 ; v1(1891,209) 1949.08,209 U1.64 ; v1(2115,483) 2158.12,483 U1.61@2160.08,484.96 ; v1@2115.98,419.02 U1.61@2159.1,419.02 ; v1(2118,550) v1(2118,550) 2160.04,549.96 U1.61@2160.08,549.92 ; v1(2220,381) 2220.77,381.77 2220.77,415.73 U1.61@2225.04,420 ; U1.61@2222.04,549.96 v1@2222.04,595.04 ; U1.61@2290,420 2290.5,419.5 2331.5,419.5 v1(2332,419) ; U1.61@2290,484.96 2292.27,487.23 2333.23,487.23 v1(2334,488) ; U1.61@2290,549.92 2290.84,549.92 2291.15,550.23 2332.23,550.23 v1(2333,551)
  L1 w25: v1(1814,741) 1876,741 1895.55,760.55 U1.63
  other v1: 652,204 859,204 980,204 577,205 896,205 937,205 2454,250 2454,283 2453.63,316.64 2453.63,350.1 2453.63,383.57 2453.63,417.03 2114,419 2453.63,450.5 2192,452 2256,453 2453.63,483.96 1578.97,488.57 1859,501 2256,517 2453.63,517.43 2192,518 1501.03,539.54 2453.63,550.89 2453.63,584.35 2221.54,595.54 2453.63,617.82 2453.63,651.28 2453.63,684.75 2426.83,713.55 2453.63,718.21
GPIO0: R14.2 R16.2 U1.4 | length 592
  L1 w6: R16.2 R14.2 2348,816 2358.9,805.1 U1.4
GPIO1: J1.3 U1.5 | length 287.9
  L1 w6: U1.5 2325.43,722.57 v1(2326,722)
  L4 w6: J1.3 2326,899 v1(2326,722)
GPIO2: D8.1 J1.4 U1.6 | length 1883
  L1 w6: v1(1615,809) 1615.78,809 1634.48,827.7 1682.97,827.7 1740.27,885 2174.14,885 2180,890.86 2180,945 J1.4 ; v1@2291.97,666.04 U1.6
  L4 w6: v1(1615,809) 1633,791 1683.72,791 1736.72,738 1770,738 1871,637 2286.07,637 2291.93,642.86 v1(2291.93,666) 2291.93,829.75 2296,833.82 2296,856.18 2262.59,889.59 2235.41,889.59 J1.4@2172.95,952.05
GPIO3: J1.5 U1.7 | length 376.7
  L1 w6: U1.7@2259.43,760.55 2259.25,760.37 2259.25,713.75 v1(2260,713)
  L4 w6: J1.5 2084.36,950.62 2088.45,950.62 2256.58,803.51 2260,800.09 v1(2260,713)
GPIO4: J1.6 U1.8 | length 553.9
  L1 w6: v1(2225,666) v1(2225,666) U1.8
  L4 w6: J1.6 1978.47,918.01 ; 1999.75,900.54 2000.65,900.57 ; 2000.76,900.58 2109.36,900.58 2112.17,898.16 2221.81,803.75 2222.07,803.49 2225,800.56 v1(2225,666)
  L4 w10: 1978.47,918.01 ccw(c1998.98,921.3) 1999.75,900.54 ; 2000.65,900.57 cw(c2001.13,890.58) 2000.76,900.58
GPIO5: J1.7 U1.9 | length 508.7
  L1 w6: U1.9@2191.29,760.26 U1.9 ; v1@2192.25,712.75 U1.9@2192.25,759.37
  L4 w6: J1.7 1884,950 1956.48,877.52 2104.52,877.52 2193,789.04 v1(2193,712)
GPIO6: J1.8 U1.10 | length 672.2
  L1 w6: v1(2158,665) U1.10@2158.04,759.55
  L4 w6: J1.8 1822,903 1902.72,903 1948.2,857.52 2096.24,857.52 2158,795.76 v1(2158,665)
GPIO7: J1.9 U1.11 | length 646.4
  L1 w6: v1@2125.25,713.75 U1.11@2125.25,760.37
  L4 w6: J1.9 1724,901 1795.72,901 1813.72,883 1894,883 1942.26,834.74 2090.74,834.74 2126,799.47 v1(2126,713)
GPIO8: J1.10 U1.12 | length 808.2
  L1 w6: v1(2091,666) U1.12@2091.04,760.55
  L4 w6: J1.10 1622,903 1692,903 1717,878 1790.43,878 1805.43,863 1885.72,863 1933.98,814.74 2079,814.74 2091,802.74 v1(2091,666)
GPIO9: J1.11 U1.13 | length 772.2
  L1 w6: v1@2058.25,714.75 U1.13@2058.25,761.37
  L4 w6: J1.11 1542,883 1679.28,883 1704.28,858 1780,858 1795,843 1877.43,843 1925.7,794.74 2053.14,794.74 2059,788.88 v1(2059,714)
GPIO10: J1.12 U1.14 | length 892.5
  L1 w6: v1(2024,667) U1.14@2024.04,761.55
  L4 w6: J1.12 1462,863 1671,863 1696,838 1763,838 1778,823 1867,823 1916.57,773.43 1971.75,773.43 2024,721.18 v1(2024,667)
GPIO11: J1.13 U1.15 | length 861
  L1 w6: v1@1991.25,715.75 U1.15@1991.25,762.37
  L4 w6: J1.13 1382,843 1660,843 1685,818 1754.72,818 1769.72,803 1858.72,803 1908.28,753.43 1953.57,753.43 v1(1992,715)
GPIO12: J1.14 U1.16 | length 876.8
  L1 w6: v1(1736.39,711) 1738.39,713 1887,713 1893.21,719.21 U1.16
  L4 w6: J1.14 1302,823 1562.82,823 1605,780.82 1674.82,711 v1(1736.39,711)
GPIO13: J1.15 U1.17 | length 985.4
  L1 w6: v1(1768,684) 1769.75,685.75 U1.17
  L4 w6: J1.15 1228,797 1511.82,797 1545.82,763 1568.18,763 1588.18,743 1611.14,743 1670.14,684 v1(1768,684)
GPIO14: J1.16 U1.18 | length 1097.6
  L1 w6: v1(1794,652) U1.18@1949.17,652
  L4 w6: J1.16 1148,777 1503.53,777 1557.53,723 1602.85,723 1673.85,652 v1(1794,652)
GPIO15: J1.17 U1.19 | length 1212.4
  L1 w6: v1(1808.24,619.76) 1809.18,618.82 U1.19
  L4 w6: J1.17 1068,757 1495.25,757 1549.25,703 1594.57,703 1678.75,618.82 1807.29,618.82 v1(1808.24,619.76)
GPIO16: J1.18 U1.20 | length 1335.9
  L1 w6: v1(1818,586) 1818.32,585.68 1949.13,585.68 U1.20
  L4 w6: J1.18 820.55,876.74 821.36,875.93 824.29,873 923.71,873 1050.71,746 1059.72,737 1486.96,737 1540.96,683 1586.28,683 1683.28,586 v1(1818,586)
GPIO17: J1.19 U1.21 | length 1439.4
  L1 w6: v1(1833,553) 1833.56,552.44 1948.89,552.44 U1.21
  L4 w6: J1.19 772,853 850.82,853 944.82,759 990.82,713 1445.18,713 1505.18,653 1588,653 1688,553 v1(1833,553)
GPIO18: J1.20 U1.22 | length 1557.3
  L1 w6: v1(1560,551.09) 1561.82,552.91 1634.09,552.91 1634.18,553 1794.82,553 1821.82,526 1844.18,526 1847.18,529 1886.18,529 1896.76,518.43 U1.22
  L4 w6: J1.20 636.26,888.74 704.44,888.74 768,825.18 840,825.18 976.18,689 1422.09,689 v1(1560,551.09)
GPIO21: J2.18 U1.25 | length 1328.9
  L1 w6: v1(1781.95,365) 1784.42,367.47 1854.47,367.47 1905.03,418.03 U1.25
  L4 w6: J2.18 860,137 1054,137 1117,200 1330.86,200 1371.86,241 1507.43,241 1595.43,329 1709.53,329 1738.53,358 1773.55,358 1780.55,365 v1(1781.95,365)
GPIO26: J2.17 U1.26 | length 1235.8
  L1 w6: v1(1805.5,340.47) 1807.97,338 1857,338 1911,392 1934.14,392 1941.57,384.57 U1.26
  L4 w6: J2.17 924,101 998,101 1014,117 1072,117 1135,180 1339.15,180 1380.15,221 1515.72,221 1603.72,309 1717.82,309 1746.82,338 1769.18,338 1782.95,324.23 1791.23,324.23 1805.5,338.5 v1(1805.5,340.47)
GPIO33: J2.16 U1.28 | length 1093.5
  L1 w6: v1(1758,311) 1760.68,313.68 1777.5,313.68 1777.82,314 1800.18,314 1800.71,313.47 1911.47,313.47 1915.64,317.64 U1.28
  L4 w6: J2.16 983,50 1030,97 1091.72,97 1152.72,158 1345.43,158 1388.43,201 1524,201 1612,289 1675.94,289 1682.94,282 1729,282 v1(1758,311)
GPIO34: J2.15 U1.29 | length 981.5
  L1 w6: v1(1789,287) 1790.41,285.59 1947.69,285.59 U1.29@1949.28,284
  L4 w6: J2.15 1161,138 1353.72,138 1396.72,181 1535,181 1596,242 1601.72,242 1628.72,269 1667.65,269 1674.65,262 1743.09,262 1765.41,284.32 1786.32,284.32 v1(1789,287)
GPIO35: J2.14 U1.31 | length 1020.1
  L1 w6: U1.31@1990.58,210.28 1991.39,211.09 1991.39,300.39 v1(1992,301)
  L4 w6: J2.14 1182,50 1250,118 1362,118 1405,161 1549,161 1637,249 1659.37,249 1666.37,242 1752,242 1770,260 1825,260 1866,301 v1(1992,301)
GPIO36: J2.13 U1.32 | length 900.4
  L1 w6: U1.32@2024.63,211.51 2024.63,268.63 v1(2025,269)
  L4 w6: J2.13 1287.61,50 1334.61,97 1376,97 1416,137 1555.53,137 1613.53,195 1675,195 1702,222 1762.28,222 1780.28,240 1834,240 1855,261 1974.8,261 1982.8,269 v1(2025,269)
GPIO37: J2.12 U1.33 | length 909.9
  L1 w6: U1.33 2059,210.65 v1(2059,302)
  L4 w6: J2.12 1440,117 1563.82,117 1604.82,158 1694,158 1711,175 1746.82,175 1791.82,220 1863,220 1883,240 2042,240 2059,257 v1(2059,302)
GPIO38: J2.11 U1.34 | length 801.4
  L1 w6: U1.34 v1@2091.18,272.82
  L4 w6: J2.11 1520,97 1590,97 1597,104 1598.72,104 1632.25,104 1646.85,118.6 1684.6,118.6 1703,137 1787.43,137 1793.43,143 1801.18,143 1818.18,160 1889,160 1916,187 1945,187 1977,219 2084.14,219 2091,225.86 v1(2091,273)
GPIO39: J2.10 U1.35 | length 794.8
  L1 w6: U1.35@2124.82,209.59 2124.82,297.82 v1(2125,298)
  L4 w6: J2.10 1607,84 1640.53,84 1653.53,97 1692,97 1712,117 1795.72,117 1801.72,123 1809.47,123 1826.47,140 1899,140 1926,167 1965,167 1997,199 2114,199 2125,210 v1(2125,298)
GPIO40: J2.9 U1.36 | length 695.8
  L1 w6: U1.36@2157.75,209.63 2158.56,210.44 2158.56,273.56 v1(2159,274)
  L4 w6: J2.9 1687.61,50 1703.35,65.73 1703.73,65.73 1735,97 1804,97 1810,103 1817.75,103 1833.75,119 1909,119 1936,146 1974,146 2005,177 2151,177 2159,185 v1(2159,274)
GPIO41: J2.8 U1.37 | length 686.2
  L1 w6: v1(2191,300) 2191.29,299.71 U1.37@2191.29,210.12
  L4 w6: J2.8 1785.28,50 1814.95,79.67 1822.7,79.67 1842.04,99 1919,99 1942,122 1982,122 2017,157 2174,157 2192,175 2192,299 v1(2191,300)
GPIO42: J2.7 U1.38 | length 552.5
  L1 w6: U1.38@2226,211.88 2225.52,212.36 2225.52,267.52 v1(2226,268)
  L4 w6: J2.7 1886.86,50 1912.86,76 1925,76 1949,100 1994,100 2031,137 2185,137 2226,178 v1(2226,268)
GPIO45: J2.4 U1.41 | length 430.7
  L1 w6: v1(2325,304) 2325.22,303.78 2325.22,211.19 U1.41@2325.72,210.69
  L4 w6: J2.4 2179.73,56.73 2212.73,56.73 2326,170 2326,303 v1(2325,304)
GPIO46: J2.3 U1.44 | length 264.3
  L1 w6: J2.3 2332,109 2403,109 2425.83,131.83 U1.44
GPIO47: J2.22 U1.27 | length 1814.5
  L1 w6: v1(1900.55,341.55) 1904.34,341.55 1913.89,351.1 U1.27
  L4 w6: J2.22 491,168 562.72,168 571.72,177 1033.72,177 1096.72,240 1285,240 1358,313 1391.18,313 1402.18,324 1517.72,324 1612.72,419 1642.82,419 1665.18,419 1681,403.18 1692.18,392 1795.52,392 1832.5,355.02 1832.5,315.78 1838.35,309.92 1846.64,309.92 1857.72,321 1880,321 v1(1900.55,341.55)
GPIO48: J2.21 U1.30 | length 1690.1
  L1 w6: v1(1654,392) 1656.68,389.32 1656.68,366.32 1738,285 1772.29,250.71 U1.30
  L4 w6: J2.21 580,157 1042,157 1105,220 1322.58,220 1363.58,261 1483,261 1614,392 v1(1654,392)
NetC7_1: C7.1 C17.1 L1.2 R27.2 | length 283.5
  L1 w15: L1.2 722.2,201.14 738.33,185.02 738.33,149.79 747.11,141 778.47,141 787.25,149.79 787.25,167.25 C17.1 ; L1.2@715.07,196.07 720,191.14 720,112 C7.1
NetD8_2: D8.2 R25.1 | length 77.8
  L1 w6: D8.2 1685.58,794.88 1703.22,794.88 1726.98,818.63 1745.63,818.63 R25.1@1746.67,819.67
NetD9_2: D9.2 R26.1 | length 49.8
  L1 w6: D9.2 R26.1@1727.77,178.7
NetJ3_A5: J3.A5 R8.2 | length 106
  L1 w6: J3.A5 277.21,844.21 306,873 330,873 R8.2
NetJ3_B5: J3.B5 R7.2 | length 240.2
  L1 w6: J3.B5 315.98,726.1 316.98,725.11 383.29,725.11 405.18,747 R7.2@468,747
NetJ4_A5: J4.A5 R19.2 | length 156.2
  L1 w6: J4.A5 271,269.21 387.19,269.21 390.98,273 R19.2@392,273
NetJ4_B5: J4.B5 R18.2 | length 223.1
  L1 w12: J4.B5 272.57,151.1 301.66,122.02 305.58,122.02 327.6,100 386,100 401,115 R18.2
NetL1_1: L1.1 U3.2 | length 169.9
  L1 w15: L1.1 710,312.21 718.79,321 738,321 777,282 U3.2@816.79,282
NetQ1_1: Q1.1 R15.1 | length 122.6
  L1 w6: R15.1 1080.87,636.87 1130.66,636.87 1145.78,652 Q1.1
NetQ2_1: Q2.1 R17.1 | length 144.5
  L1 w6: R17.1@1058.86,814.19 1059.88,813.17 1079.83,813.17 1111,782 Q2.1
NetR9_2: R9.2 U2.23 | length 103.8
  L1 w10.01: U2.23 R9.2@993.77,686.77
RTS_FTDI: Q1.2 R17.2 U2.3 | length 642.8
  L1 w6: U2.3 653.29,763.54 662.27,754.56 v1(666.06,754.56) ; v1(770,754.56) 868.05,852.61 970.85,852.61 1037.47,786 R17.2 1059,764.47 1088.13,735.34 1088.13,718.87 Q1.2
  L4 w6: v1(666.06,754.56) v1(770,754.56)
RXD_FTDI: R12.2 U2.5 | length 1748.8
  L1 w6: v1(558,713) 558.64,712.36 U2.5 ; v1(1442.19,522.53) 1463.3,510.06 1531.79,441.57 1601.14,441.57 1607,435.72 1607,359.43 1755.72,210.71 1822.82,210.71 1874.91,158.62 1917.38,158.62 1934.19,141.81 1935.37,141.81 1941,136.18 R12.2
  L4 w6: v1(558,713) 895.61,713 959.61,649 1371,649 1418.76,601.24 1418.76,549.71 1442.19,526.28 v1(1442.19,522.53)
TXD_FTDI: R13.2 U2.1 | length 1930
  L1 w6: v1@543,814 v1(543.36,814.36) 543.72,814.72 U2.1 ; v1(1466.63,546.16) 1474.03,528.36 1483.58,518.06 1540.07,461.57 1618.43,461.57 1627,453 1627,367.72 1764.01,230.71 1831.11,230.71 1883.19,178.62 1971.03,178.62 2014.65,135 R13.2
  L4 w6: v1(543.36,814.36) 566.72,791 845.9,791 967.9,669 1389.18,669 1466.63,591.55 v1(1466.63,546.16)
U0RXD: J2.5 R13.1 U1.40 | length 517.7
  L1 w6: J2.5 2074.13,51.13 2074.13,133.87 R13.1 ; v1(2290,270) 2290.98,269.02 2290.98,211.39 U1.40@2291.75,210.63
  L4 w6: J2.5 2120,97 2224,97 2291,164 2291,269 v1(2290,270)
U0TXD: J2.6 R12.1 U1.39 | length 643.3
  L1 w6: R12.1 1972,134 1972,51 J2.6 ; v1(2258,301) 2258.25,300.75 U1.39@2258.25,212.24
  L4 w6: J2.6 2040,117 2210,117 2258,165 v1(2258,301)
pads on no net: J3.A8 J3.B8 J4.A8 J4.B8 J4.S2 U2.6 U2.8 U2.9 U2.10 U2.11 U2.12 U2.13 U2.22 U2.24 U2.25 U2.26 U2.27 U2.28

## Polygon pours and split planes (outlines as drawn)
+5V_VBUS1 on L1 "+5V_VBUS1_L01_P014" (solid, pour order 14): 337,686 337,613 420,613 424,609 427,612 427,682
GND on L1 "GND_L01_P008" (solid, pour order 8): 788.07,259 774.1,190.08 1016.43,143.44 1035,162 1017,180 1017,221 880,221 873,228 873,261.12
+3v3 on L1 "+3V3_L01_P000" (solid, pour order 0): 2336.92,829.93 2402,833 2399,868.88 2417,870 2416,877 2417,878 2416,899 2411,902 2353,904 2341.7,865.13
+3V3_FTDI on L1 "+3V3_FTDI_L01_P002" (solid, pour order 2): 1013.45,492.62 1016.28,405.76 984.24,405.76 970,420 944.48,423.65 944.48,507.75 944.48,523 1055.23,521.23 1054,497
+5V on L1 "+5V_L01_P004" (solid, pour order 4): 886,227.51 886,270 1046,270 1044,268 1044,227.51 884.49,227.51 883,229
GND on L1 "GND_L01_P007" (solid, pour order 7): 2066,607 2066,349 2074,341 2394,341 2394,624 2390,620 2384,624 2065,624
+5V_VBUS2 on L1 "+5V_VBUS2_L01_P006" (solid, pour order 6): 312,474 312,443 335,420 335,407 332,407 314,389 314,355 412,355 409,358 409,450 383,476 316,476
GND on L2 "GND_L02_P013" (solid, pour order 13): 0,880 0,986.29 2525,904.03 2525,-40 2525,0 0,0
+3v3 on L2 "+3V3_L02_P012" (solid, pour order 12): 2516,986 2516,791 2490,765 1826,765 1826,681 1831,578 1831,488 1850,140 1516,161 1400,277 1428,305 1428,668 1280,668 1118.01,517.51 1055.81,520.65 1090.11,847.11 1244,1001
+3v3_REG on L2 "+3V3_REG_L02_P011" (solid, pour order 11): 610.96,94.91 621.93,144.41 639.16,465.33 1034.67,465.33 1110,390 1110,95.08
GND on L3 (split plane): 2524.95,0.05 0.05,0.05 0.05,999.95 2524.95,999.95

## Silkscreen, mask and mechanical layers (free items; w line width, h text height)
Top Overlay:
  text "J1" at 2179.33,844 h40
  text "POWER" at 1636,706 h40
  text "BOOT/USER" at 1256,566 h40
  text "USB1" at 201,549 h20
  text "UART" at 36,546 h40
  text "5V" at 224,500 h20
  text "REG" at 1356,456 h40
  text "USB2" at 195,447 h20
  text "3V3" at 1063,443 h40
  text "ESP" at 25,440 h40
  text "RESET" at 1336,376 h40
  text "USER" at 1637,257 h40
  text "J2" at 2166,106 h40
Bottom Overlay:
  text "3V3" at 2494,874 h40 r90
  text "GND" at 394,864 h40 r90
  text "+5V" at 494,864 h40 r90
  text "IO18" at 594,864 h40 r90
  text "IO17" at 694,864 h40 r90
  text "IO16" at 794,864 h40 r90
  text "IO15" at 894,864 h40 r90
  text "IO14" at 994,864 h40 r90
  text "I013" at 1091.93,864.5 h40 r90
  text "IO12" at 1194,864 h40 r90
  text "IO11" at 1294,864 h40 r90
  text "IO10" at 1394,864 h40 r90
  text "IO9" at 1494,864 h40 r90
  text "IO8" at 1594,864 h40 r90
  text "IO7" at 1694,864 h40 r90
  text "I06" at 1791.93,864.5 h40 r90
  text "IO5" at 1894,864 h40 r90
  text "IO4" at 1994,864 h40 r90
  text "IO3" at 2094,864 h40 r90
  text "IO2" at 2194,864 h40 r90
  text "IO1" at 2294,864 h40 r90
  text "IO0" at 2394,864 h40 r90
  text "<---PIN1--->" at 2494,744 h40 r90
  text "AQUAPHOTON ACADEMY" at 2000,610 h60
  text "I GUESS WE WILL NEVER KNOW" at 1983,377 h40
  text "KANYE WEST" at 1704,316 h40
  text "IO47" at 404,274 h40 r90
  text "IO48" at 504,274 h40 r90
  text "USB-" at 594,274 h40 r90
  text "USB+" at 694,274 h40 r90
  text "IO21" at 794,274 h40 r90
  text "IO26" at 894,274 h40 r90
  text "IO33" at 994,274 h40 r90
  text "I034" at 1094,274 h40 r90
  text "IO35" at 1194,274 h40 r90
  text "IO36" at 1294,274 h40 r90
  text "IO37" at 1404,274 h40 r90
  text "IO38" at 1504,274 h40 r90
  text "IO39" at 1594,274 h40 r90
  text "IO40" at 1694,274 h40 r90
  text "IO41" at 1794,274 h40 r90
  text "IO42" at 1894,274 h40 r90
  text "RXD" at 2094,274 h40 r90
  text "IO45" at 2194,274 h40 r90
  text "IO46" at 2294,274 h40 r90
  text "EN" at 2394,274 h40 r90
  text "GND" at 2494,274 h40 r90
  text "TXD" at 1997.9,273 h40 r90
Board Shape:
  lines w20: 0,0 0,990 4,994 2522.5,994 2522.87,993.62 2522.87,0 0,0

## Text inside footprints (layer, text, board x,y; h text height)
SW1: Bottom Solder "Designator" at 1338.26,750.47 h60
SW2: Bottom Solder "Designator" at 1331.26,250.47 h60